# Altium PCB Battery Charger.PcbDoc
Units mm, origin at the board's own origin, x right, y up, seen from the top; angles counter-clockwise.
Board outline 47.78 x 47.78 mm, 2 copper layers (Top Layer, Bottom Layer); 8 components, 6 nets, 32 pads, 1 vias.
Unrouted connection lines stored in the file: 18.
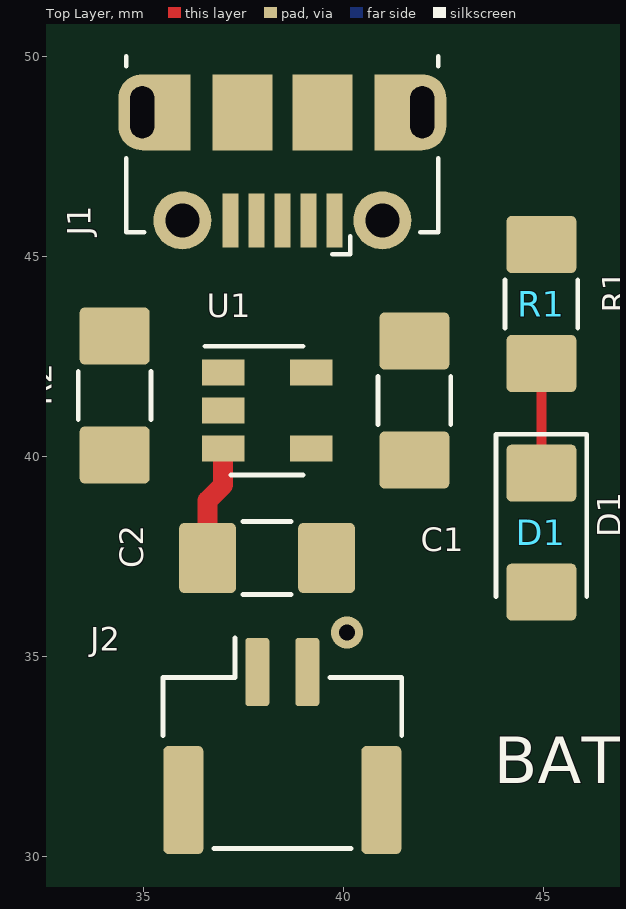
[diagram p0: Top Layer view]
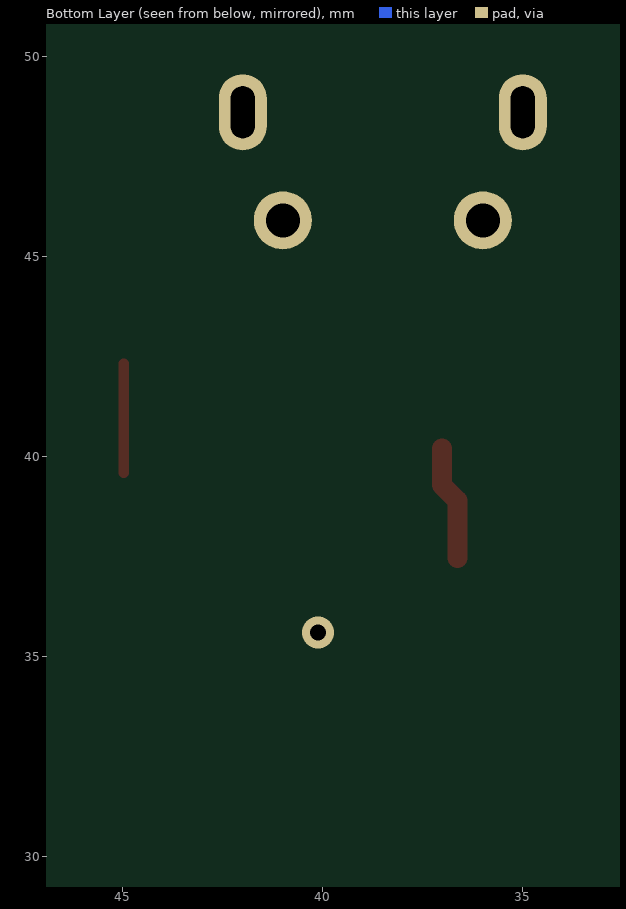
[diagram p1: Bottom Layer view, seen from below]

## Layer stack, top to bottom
Top Solder: solder mask 0.0102, Solder Resist, Dk 3.5
Top Layer: signal copper 0.0356
Dielectric 1: dielectric 0.32, FR-4, Dk 4.8
Bottom Layer: signal copper 0.0356
Bottom Solder: solder mask 0.0102, Solder Resist, Dk 3.5

## Board outline
38.354,16.498 cw(c38.354,40.386) 14.466,40.386 cw(c38.354,40.386) 38.354,64.274 cw(c38.354,40.386) 62.242,40.386 cw(c38.354,40.386)

## Design rules (kind name [scope] priority, off if disabled: settings)
Clearance [All] p1: gap=0.2 ignorepadtopadclearanceinfootprint=FALSE
PolygonConnect [All] p1: connectstyle=Relief reliefconductorwidth=0.254 reliefentries=4 polygonreliefangle="90 Angle" airgapwidth=0.254
RoutingVias [All] p1: holewidth=0.711 width=1.27 viastyle="Through Hole" minholewidth=0.711 minwidth=1.27 maxholewidth=0.711 maxwidth=1.27
SolderMaskExpansion [All] p1: expansion=0.102 istentingtop=FALSE
Width "Schematic Width Constraint_1" [InNet('V_BATT')] p1: maxlimit=0.6 minlimit=0.4 preferedwidth=0.5
Width [All] p2: maxlimit=0.254 minlimit=0.254 preferedwidth=0.254
30 further rules are at their usual default settings.

## Components (designator, comment, footprint, x,y, rotation, side; value= is the part's Value field where it differs from the comment)
C1 "4.7uF" C_1206_3216Metric_Pad1.42x1.75mm_HandSolder 41.783,41.402 r90 top
C2 "4.7uF" C_1206_3216Metric_Pad1.42x1.75mm_HandSolder 38.1,37.465 r0 top
D1 "LED" LED_1206_3216Metric_Pad1.42x1.75mm_HandSolder 44.958,38.1 r270 top
J1 "USB_B_Micro" USB_Micro-B_Molex-105017-0001 38.481,47.371 r180 top
J2 "Conn_01x02" JST_GH_SM02B-GHS-TB_1x02-1MP_P1.25mm_Horizontal 38.481,32.766 r0 top
R1 "470R" R_1206_3216Metric_Pad1.42x1.75mm_HandSolder 44.958,43.815 r90 top
R2 "2k" R_1206_3216Metric_Pad1.42x1.75mm_HandSolder 34.29,41.529 r270 top
U1 "MCP73831-2-OT" SOT-23-5 38.1,41.148 r0 top

## Footprints (in the part's own frame and the unit in brackets; to place one, negate y for a bottom-side part, rotate by r counter-clockwise, add the part's x,y. Pads: shape width x height; smd on the part's side, far side on the other; paste and mask are expansions set on the pad)
C_1206_3216Metric_Pad1.42x1.75mm_HandSolder [mm]
  rrect18% 1.425x1.75 smd mask+0.051: 1(-1.488,0) 2(1.488,0)
  silkscreen extent -0.6,-0.91 0.6,0.91
JST_GH_SM02B-GHS-TB_1x02-1MP_P1.25mm_Horizontal [mm]
  rrect25% 0.6x1.7 smd mask+0.051: 1(-0.625,1.85) 2(0.625,1.85)
  rrect25% 1x2.7 smd mask+0.051: MP(-2.475,-1.35) MP(2.475,-1.35)
  silkscreen extent -2.99,-2.56 2.99,2.7
LED_1206_3216Metric_Pad1.42x1.75mm_HandSolder [mm]
  rrect18% 1.425x1.75 smd mask+0.051: 1(-1.488,0) 2(1.488,0)
  silkscreen extent -2.46,-1.13 1.6,1.13
R_1206_3216Metric_Pad1.42x1.75mm_HandSolder [mm]
  rrect18% 1.425x1.75 smd mask+0.051: 1(-1.488,0) 2(1.488,0)
  silkscreen extent -0.6,-0.91 0.6,0.91
SOT-23-5 [mm]
  rect 1.06x0.65 smd mask+0.051: 1(-1.1,0.95) 2(-1.1,0) 3(-1.1,-0.95) 4(1.1,-0.95) 5(1.1,0.95)
  silkscreen extent -1.55,-1.61 0.9,1.61
USB_Micro-B_Molex-105017-0001 [mm]
  rect 0.4x1.35 smd mask+0.051: 1(-1.3,1.462) 2(-0.65,1.462) 3(0,1.462) 4(0.65,1.462) 5(1.3,1.462)
  rrect100% 1.2x1.9 hole 1.3 slot 0.6 at 0 deg paste-1.9 mask+0.051: 6(-3.5,-1.238) 6(3.5,-1.238)
  rect 1.2x1.9 smd paste-1.9 mask+0.051: 6(-2.9,-1.238) 6(2.9,-1.238)
  round 1.45 hole 0.85 paste-1.45 mask+0.051: 6(-2.5,1.462) 6(2.5,1.462)
  rect 1.5x1.9 smd mask+0.051: 6(-1,-1.238) 6(1,-1.238)
  silkscreen extent -3.9,-2.64 3.9,2.31

## Part data
C1 C2: library part C_Small
R1 R2: library part R

## Via types
v1: diameter 0.8, hole 0.4, Top Layer to Bottom Layer, tented both sides, 1 vias

## Nets (pads, with @x,y where several pads share a name; then routed paths per layer and width w, separated by ;. In a path a pad name is that pad's centre, name@x,y a point inside that pad or via, vN(x,y) a via of type N, cw(c..) or ccw(c..) an arc to the next point about the centre after c; other vN are vias at no path point)
GND: C1.2 C2.2 J1.5 J1.6 J2.2 R2.2 U1.2
NetD1_1: D1.1 R1.1 | length 2.7
  Top Layer w0.254: D1.1 R1.1
NetR2_1: R2.1 U1.5
STAT: R1.2 U1.1
V_BATT: C2.1 J2.1 U1.3 | length 2.9
  Top Layer w0.5: C2.1 36.612,38.898 37,39.286 U1.3
VBUS: C1.1 D1.2 J1.1 U1.4
pads on no net: J1.2 J1.3 J1.4 J2.MP
copper on no net: | length 0.1
  Top Layer w0.25: v1(40.096,35.605) v1@40.096,35.686

## Silkscreen, mask and mechanical layers (free items; w line width, h text height)
Top Overlay:
  text "USB" at 30.122,48.278 h1.5
  text "BAT" at 43.762,31.446 h2
Board Outline:
  circle w0.254: c38.354,40.386 r23.888

## Text inside footprints (layer, text, board x,y; h text height)
J1: Mechanical 2 "PCB Edge" at 37.923,49.867 h0.5